# Altium PCB 2019_TFT_Strateasy.PCBDOC
Units mm, origin at the board's own origin, x right, y up, seen from the top; angles counter-clockwise.
Board outline 92.79 x 44.15 mm, 4 copper layers (1-TOP, 2-SIGNAL, 3-GND, 4-BOT), stack 1.727 mm thick; 51 components, 36 nets, 248 pads, 86 vias.
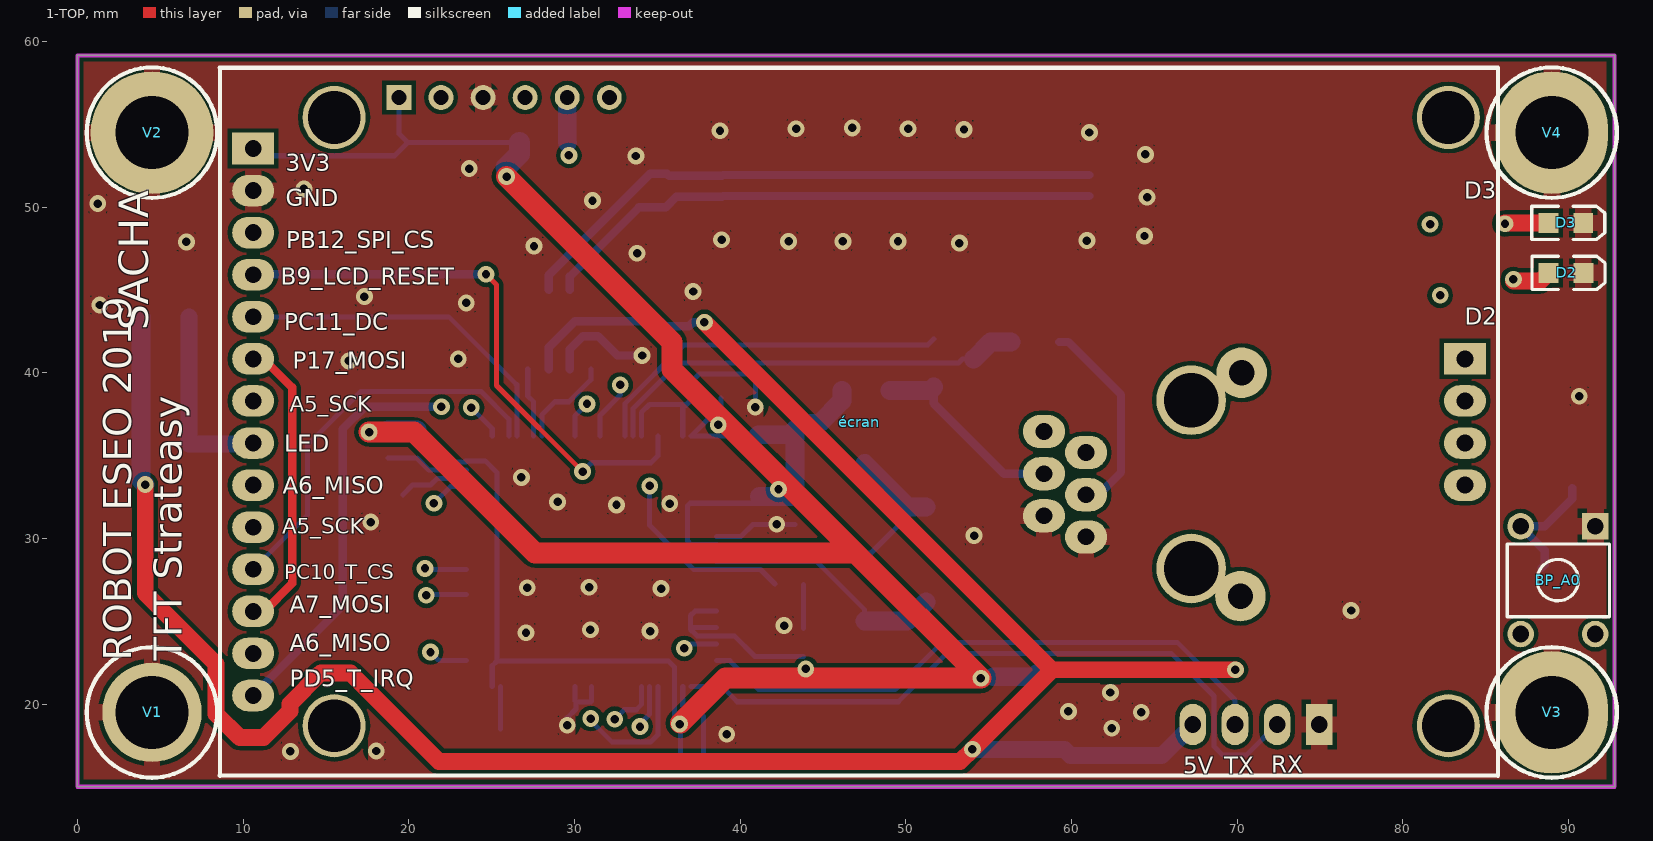
[diagram p0: 1-TOP view]
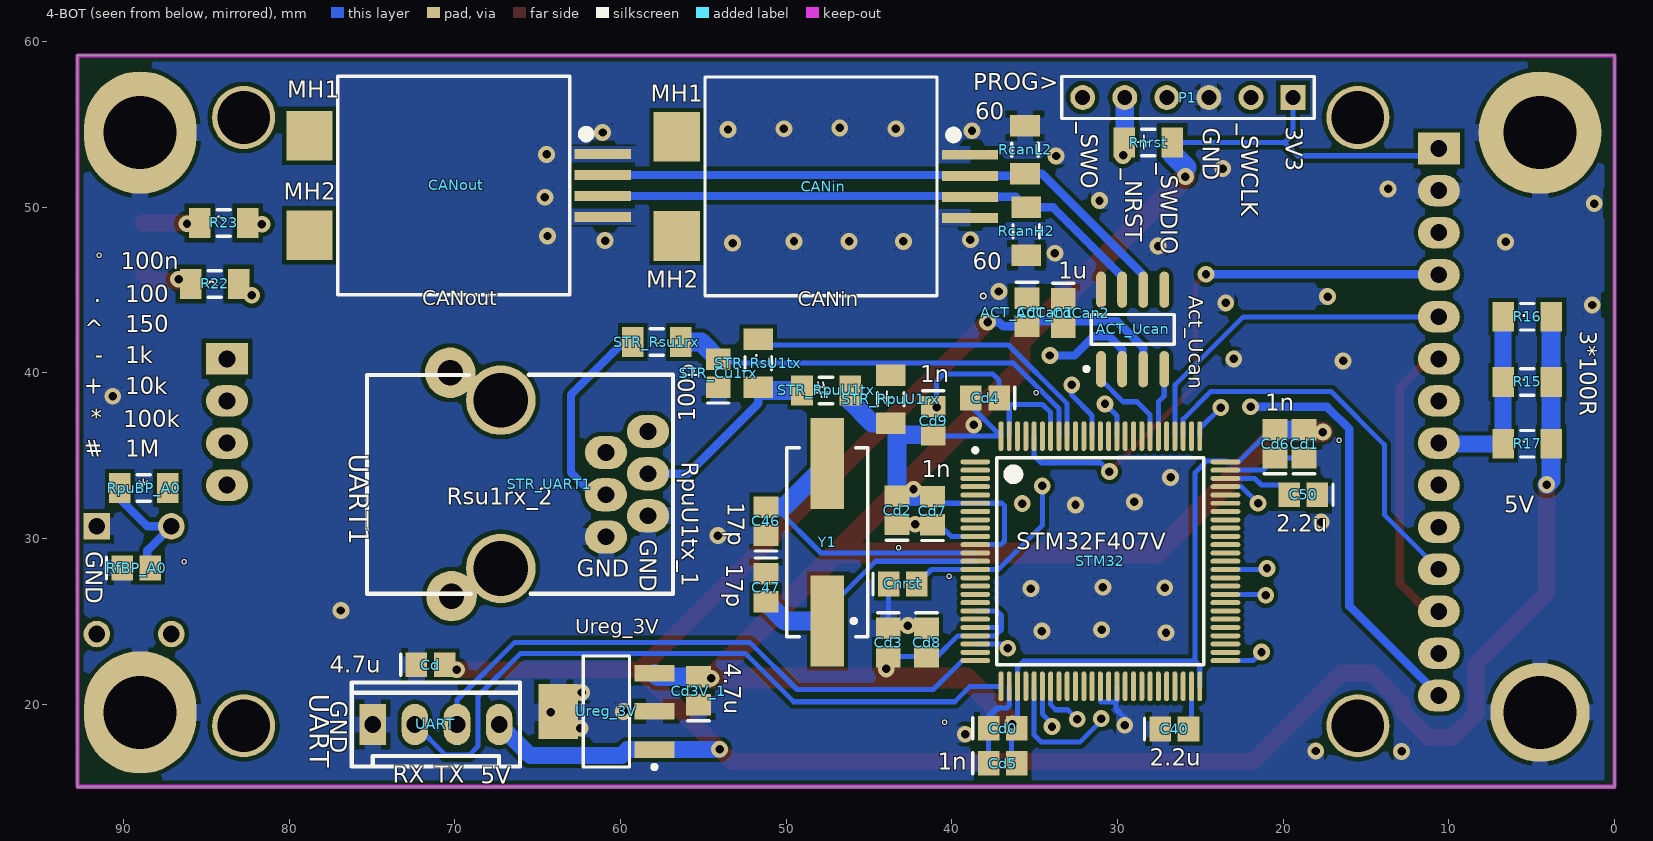
[diagram p1: 4-BOT view, seen from below]
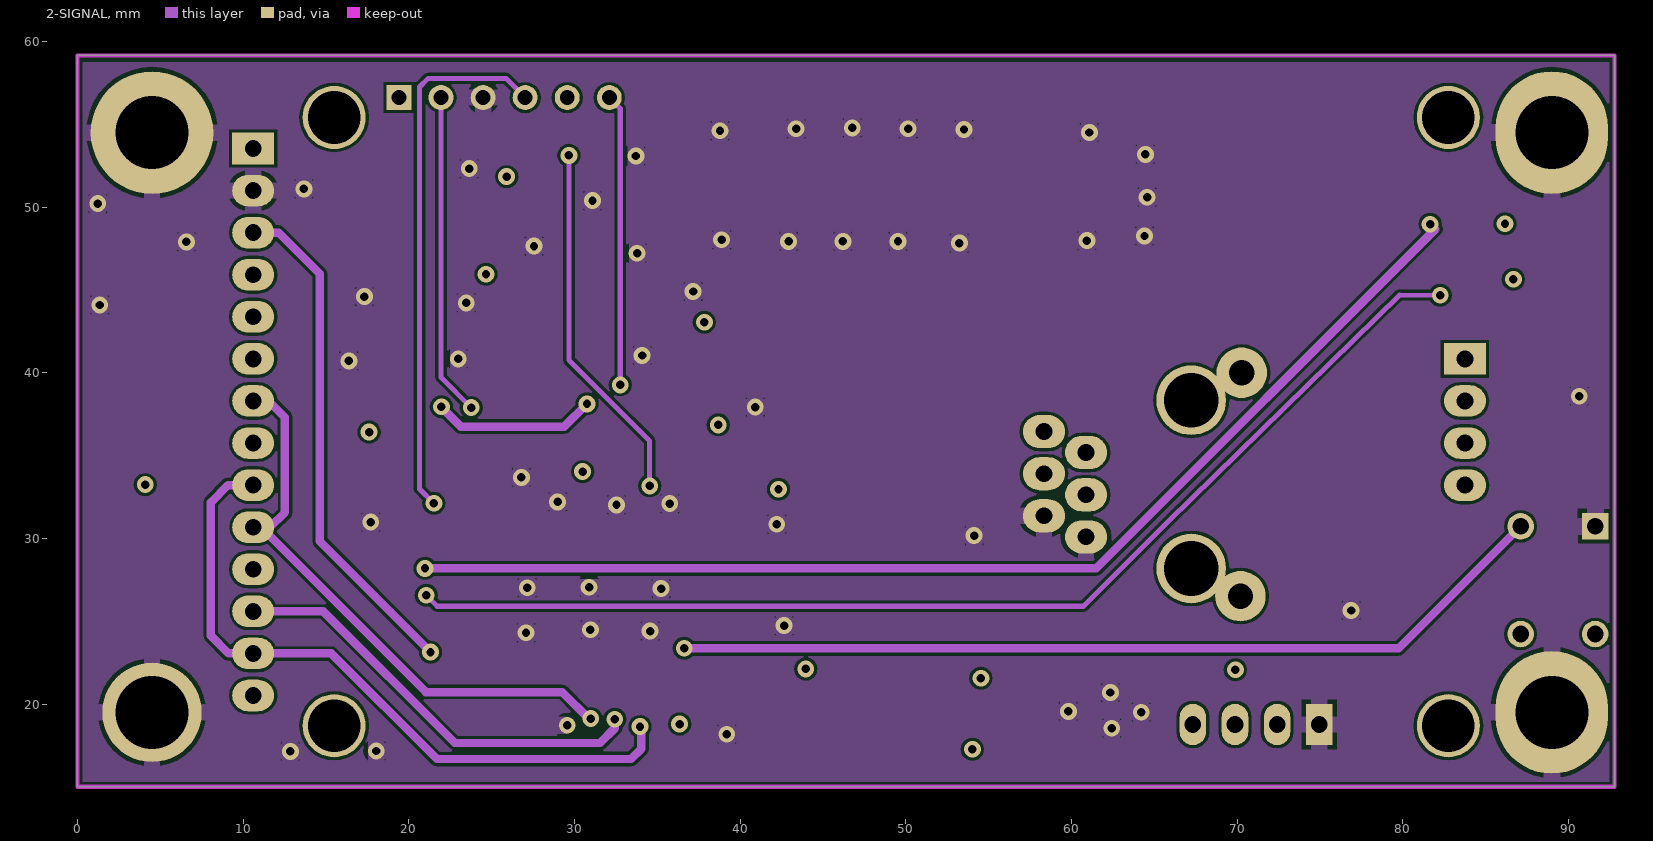
[diagram p2: 2-SIGNAL]
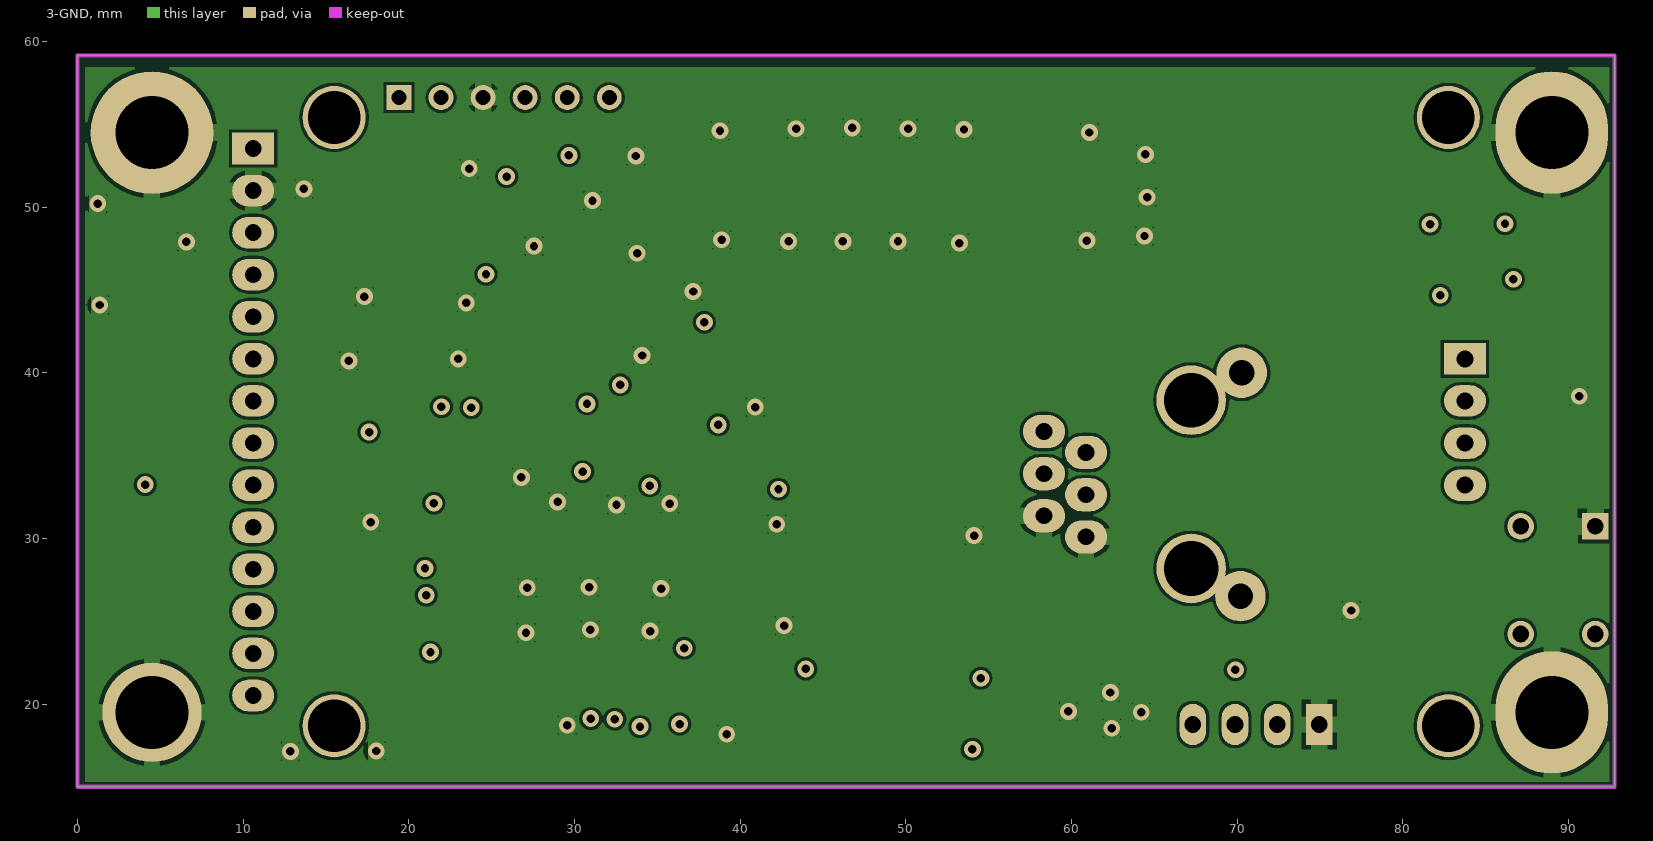
[diagram p3: 3-GND]
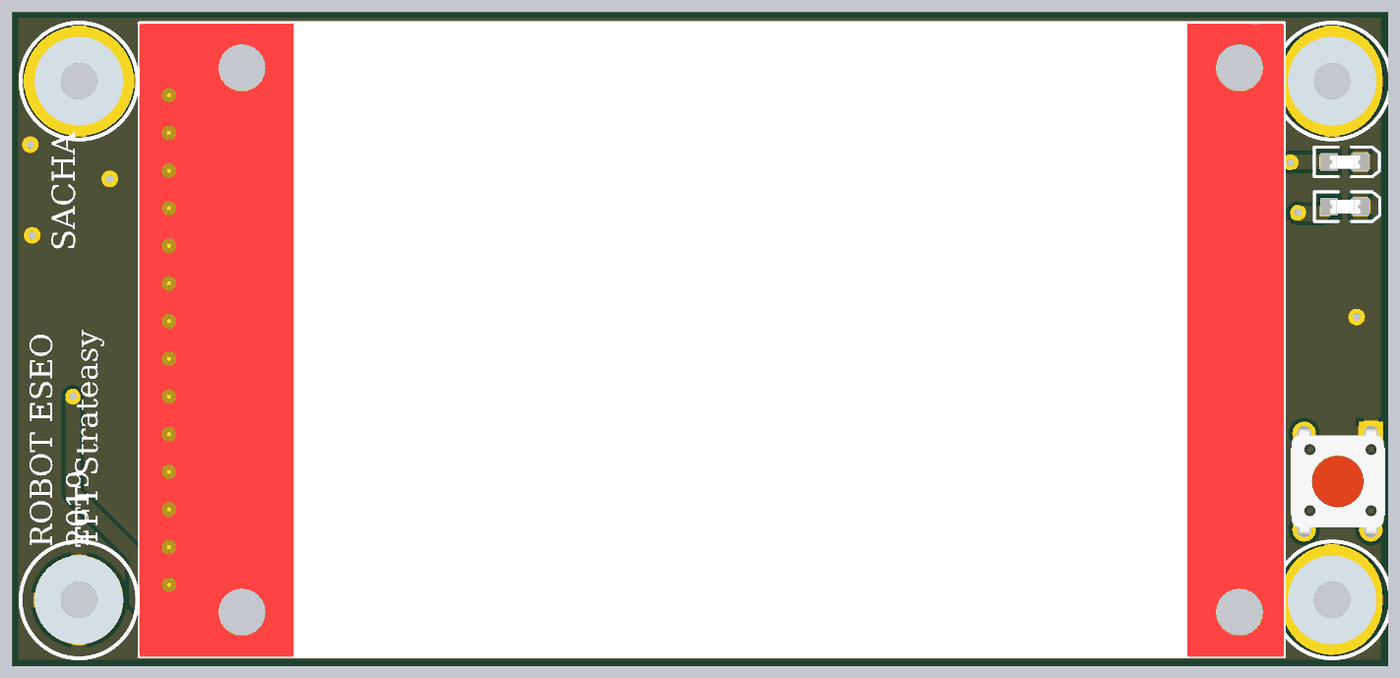
[diagram p4: 3D render of the assembled board from above, using the file's embedded part models]
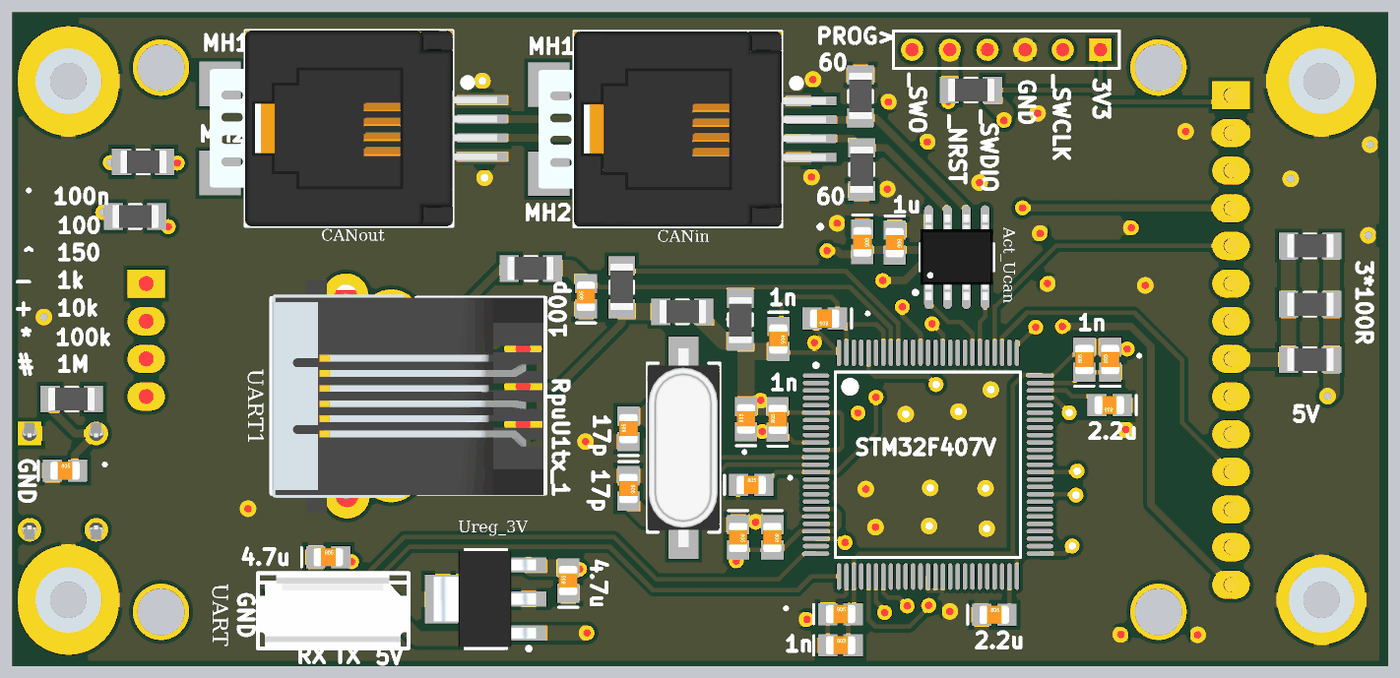
[diagram p5: 3D render of the assembled board from below, using the file's embedded part models]

## Layer stack, top to bottom
Top Solder: solder mask 0.0114, Solder Resist, Dk 3.5
1-TOP: signal copper 0.0356
Dielectric1: core 0.5283, FR-4, Dk 4.8
2-SIGNAL: signal copper 0.0356
Dielectric2: prepreg 0.5283, FR-4, Dk 4.8
3-GND: signal copper 0.0356
Dielectric3: core 0.5283, FR-4, Dk 4.8
4-BOT: signal copper 0.0356
Bottom Solder: solder mask 0.0114, Solder Resist, Dk 3.5

## Board outline
0,15.011 0,59.157 92.786,59.157 92.786,15.011

## Design rules (kind name [scope] priority, off if disabled: settings)
Clearance PowerPlaneClearance [InNamedPolygon('Bot-GND') Or  InNamedPolygon('Top-GND')] p1: gap=0.254
Clearance [All] p2: gap=0.178
FabricationTestPointUsage TestPointUsage [All] p1: valid=0 allowmultiple=FALSE
FabricationTestpoint Testpoint [All] p1: side=3 testpointundercomponent=TRUE minsize=1.016 maxsize=2.54 preferedsize=1.524 minholesize=0.508 maxholesize=1.016 preferedholesize=0.813 testpointgrid=0.025 allowsidetop=TRUE allowsidebottom=TRUE usegrid=TRUE gridtolerance=0
Height [All] p1: minheight=0 maxheight=50.8 prefheight=12.7
HoleSize [All] p1: absolutevalues=TRUE maxlimit=7.62 minlimit=0.025 maxpercent=80.000 minpercent=20.000
PlaneClearance [All] p1: clearance=1.016
PlaneConnect [All] p1: planeconnectstyle=Relief reliefexpansion=0.5 reliefentries=4 reliefconductorwidth=1.016 reliefairgap=0.5
PolygonConnect [All] p1: connectstyle=Relief reliefconductorwidth=1.016 reliefentries=4 polygonreliefangle="90 Angle" airgapwidth=0.254
RoomDefinition 2019_TFT_Strateasy [InComponentClass('2019_TFT_Strateasy')] p1: confinementstyle=ConfineIn formatcopy=TRUE lockcomponents=FALSE outline -101.6,-152.4 -50.8,-152.4 -50.8,-127 -101.6,-127
RoutingVias [All] p1: holewidth=0.6 width=1.524 viastyle="Through Hole" minholewidth=0.6 minwidth=1.524 maxholewidth=0.6 maxwidth=1.524
SilkToSolderMaskClearance SilkscreenOverComponentPads [IsPad] p1: minsilkscreentomaskgap=0.254 clearancetoexposedcopper=TRUE
SolderMaskExpansion [All] p1: expansion=0.051
Width [All] p1: maxlimit=25.4 minlimit=0.279 preferedwidth=1.016
22 further rules are at their usual default settings.

## Components (designator, comment, footprint, x,y, rotation, side; value= is the part's Value field where it differs from the comment)
ACT_CdCan1 "100nF" C0805_N 35.461,43.663 r270 bottom
ACT_CdCan2 "1µF" C0805_N 33.276,43.612 r270 bottom
ACT_Ucan "MCP2551-I/SN" SO8_N 29.085,42.621 r90 bottom
BP_A0 "SW_Pushbutton_6x6mm_Vertical" "Switch 6x6 Vertical" 91.618,30.732 r270 top
C40 "2.2uF" C0805_N 26.568,18.491 r180 bottom
C46 "17pF" C0805_N 51.232,31.039 r90 bottom
C47 "17pF" C0805_N 51.232,27.026 r270 bottom
C50 "2.2uF" C0805_N 18.796,32.639 r0 bottom
CANin "634104149621" 634104149621 47.904,51.257 r270 bottom
CANout "634104149621" 634104149621 70.079,51.308 r270 bottom
Cd "4.7u" C0805_N 71.476,22.377 r180 bottom
Cd0 "100nF" C0805_N 36.936,18.542 r180 bottom
Cd1 "100nF" C0805_N 18.745,35.712 r90 bottom
Cd2 "100nF" C0805_N 43.307,31.699 r90 bottom
Cd3 "100nF" C0805_N 43.84,23.724 r270 bottom
Cd3V_1 "4.7u" C0805_N 55.296,20.803 r90 bottom
Cd4 "100nF" C0805_N 37.998,38.481 r0 bottom
Cd5 "1nF" C0805_N 36.936,16.434 r180 bottom
Cd6 "1nF" C0805_N 20.49,35.711 r90 bottom
Cd7 "1nF" C0805_N 41.173,31.674 r90 bottom
Cd8 "1nF" C0805_N 41.529,23.724 r270 bottom
Cd9 "1nF" C0805_N 41.123,37.109 r270 bottom
Cnrst "100nF" C0805_N 42.959,27.254 r180 bottom
D2 "LED" LED_0805 89.857,46.033 r0 top
D3 "LED" LED_0805 89.849,49.047 r0 top
P1 "ProgSWD" HDR1X6 19.406,56.617 r0 bottom
R15 "100" R1206_N 5.275,39.446 r180 bottom
R16 "100" R1206_N 5.275,43.383 r180 bottom
R17 "100" R1206_N 5.275,35.712 r180 bottom
R22 "150" R1206_N 84.498,45.364 r180 bottom
R23 "150" R1206_N 83.964,49.047 r180 bottom
RcanH2 "60" R1206_N 35.509,48.539 r270 bottom
RcanL2 "60" R1206_N 35.585,53.467 r90 bottom
RfBP_A0 "100nF" C0805_N 89.23,28.219 r180 bottom
Rnrst "100k" R1206_N 28.143,53.899 r180 bottom
RpuBP_A0 "100k" R1206_N 88.773,33.045 r0 bottom
STM32 "STM32F407VGT6" STM-LQFP100_N 31.039,28.626 r180 bottom
STR_Cu1rx "100pF" C0805_N 54.102,39.98 r90 bottom
STR_RpuU1rx "10k" R1206_N 43.688,38.405 r270 bottom
STR_RpuU1tx "1M" R1206_N 47.6,38.938 r180 bottom
STR_Rsu1rx "1k" R1206_N 57.81,41.859 r0 bottom
STR_RsU1tx "100" R1206_N 51.689,40.589 r90 bottom
STR_UART1 "RJ11_6/6" "RJ11_6/6 - Wurth Half Shielded Tab Down WR-MJ" 58.344,31.369 r0 bottom
UART "BARRETTE4" HE14_4 74.955,18.771 r180 bottom
Ureg_3V "MCP1826S-3302E/DB" SOT223-4N 60.858,19.558 r0 bottom
V1 "Entretoise WURTH CMS" ENTRETOISE_CMS#1 4.5,19.5 r0 top
V2 "Entretoise WURTH CMS" ENTRETOISE_CMS#2 4.5,54.5 r0 top
V3 "Entretoise WURTH CMS" ENTRETOISE_CMS#3 89,19.5 r0 top
V4 "Entretoise WURTH CMS" ENTRETOISE_CMS#3 89,54.5 r0 top
Y1 "8MHz" HC49/4H_SMX 47.523,29.769 r90 bottom
écran "2.4_TFT_TOUCH" 2.4_TFT_TOUCH 8.574,15.694 r0 top locked

## Footprints (in the part's own frame and the unit in brackets; to place one, negate y for a bottom-side part, rotate by r counter-clockwise, add the part's x,y. Pads: shape width x height; smd on the part's side, far side on the other; paste and mask are expansions set on the pad)
2.4_TFT_TOUCH [mil]
  round 150 hole 125: 0(272.44,118.11) 0(272.44,1563.78) 0(2920.47,118.11) 0(2920.47,1563.78)
  rect 100x75 hole 40: 1(80,1490) 18(2959.84,990)
  oval 100x75 hole 40: 2(80,1390) 3(80,1290) 4(80,1190) 5(80,1090) 6(80,990) 7(80,890) 8(80,790) 9(80,690) 10(80,590) 11(80,490) 12(80,390) 13(80,290) 14(80,190) 15(2959.84,690) 16(2959.84,790) 17(2959.84,890)
  silkscreen extent 0,-1 3039,1682, body extent 0,-1 3039,1681, height 337
634104149621 [mm] "Modular Jack SMT Vertical Plastic 4P4C Top Entry"
  rect 0.6x3.4 smd: 1(-1.905,9) 2(-0.635,9) 3(0.635,9) 4(1.905,9)
  rect 3x2.8 smd: MH1(-3,-8.7) MH2(3,-8.7)
  silkscreen extent -6.6,-7 6.6,8.25, body extent -6.6,-9.4 6.6,10, height 13
C0805_N [mm] "Chip Capacitor, Body 2.0x1.3mm, IPC Medium Density"
  rect 1.3x1.5 smd: 1(-0.85,0) 2(0.85,0)
  silkscreen extent -1.8,-0.65 -1.8,0.65, body extent -0.99,-0.63 1.01,0.62, height 0.8
ENTRETOISE_CMS#1 [mm] "Entretoise CMS Wurth trou 4.4mm"
  round 6 hole 4.4: 1(0,0)
  silkscreen extent -3.94,-3.94 3.94,3.94, body extent -2.99,-3 2.99,2.98, height 3
ENTRETOISE_CMS#2 [mm] "Entretoise CMS Wurth trou 4.4mm"
  round 7.4 hole 4.4: 1(0,0)
  silkscreen extent -3.94,-3.94 3.94,3.94, body extent -2.99,-3 2.99,2.98, height 3
ENTRETOISE_CMS#3 [mm] "Entretoise CMS Wurth trou 4.4mm"
  oval 6.8x7.4 hole 4.4: 1(0,0)
  silkscreen extent -3.94,-3.94 3.94,3.94, body extent -2.99,-3 2.99,2.98, height 3
HC49/4H_SMX [mm] "Quartz Crystal, SM; Body 13.4 (inc. leads) x 4.9 mm (LxW max)"
  rect 5.5x2 smd: 1(-4.75,0) 2(4.75,0)
  silkscreen extent -5.7,-2.45 5.7,2.45, body extent -6.7,-2.45 6.7,2.45, height 5.08
HDR1X6 [mm]
  rect 1.5x1.5 hole 0.9: 1(0,0)
  round 1.5 hole 0.9: 2(2.54,0) 3(5.08,0) 4(7.62,0) 5(10.16,0) 6(12.7,0)
  silkscreen extent -1.27,-1.27 13.97,1.27
HE14_4 [mm] "Connector; HE14; 4 Position; Pin Spacing=2.54mm"
  rect 1.6x2.5 hole 1: 1(0,0)
  oval 1.6x2.5 hole 1: 2(2.54,0) 3(5.08,0) 4(7.62,0)
  silkscreen extent -1.27,-2.54 8.89,2.54, body extent -1.3,-2.45 8.86,2.55, height 11.42
LED_0805 [mm] "SM LED; 2 Flat Leads"
  rect 1.2x1.2 smd: 1(-1.05,0) 2(1.05,0)
  silkscreen extent -2.05,-1 2.35,1, body extent -1.05,-0.64 1.06,0.64, height 1.2
R1206_N [mm] "Chip Resistor, Body 3.2x1.6mm, IPC Medium Density"
  rect 1.3x1.8 smd: 1(-1.45,0) 2(1.45,0)
  silkscreen extent -0.4,-0.8 0.4,0.8, body extent -1.68,-0.87 1.68,0.87, height 0.71
"RJ11_6/6 - Wurth Half Shielded Tab Down WR-MJ" [mil] "Connector; RJ11; 6P/6C; 615 006 143 421"
  oval 100x78.74 hole 40: 1(0,-200) 2(100,-150.39) 3(0,-100) 4(100,-50) 5(0,0) 6(100,50)
  round 165.35 hole 130: FIX1(350,125.2) FIX2(350,-274.8)
  round 120 hole 60: FIX2(467,191) FIX2(470,-340)
  silkscreen extent -59,-335 668,185, body extent -54,-384 666,236, height 510
SO8_N [mm] "8-Pin Small Outline Integrated Circuit 1.27 mm Pitch, IPC Medium Density"
  oval 2.2x0.6 smd: 1(-2.4,1.905) 2(-2.4,0.635) 3(-2.4,-0.635) 4(-2.4,-1.905) 5(2.4,-1.905) 6(2.4,-0.635) 7(2.4,0.635) 8(2.4,1.905)
  silkscreen extent -2.51,-2.5 0.9,2.92, body extent -2.89,-2.45 2.89,2.46, height 1.75
SOT223-4N [mm] "SOT223/SC73, 4-Leads, Body 6.5x3.5mm, Pitch 2.3mm, Lead Span 7mm, IPC Medium Density"
  rect 2.4x1 smd: 1(-2.9,2.3) 2(-2.9,0) 3(-2.9,-2.3)
  rect 2.4x3.3 smd: 4(2.9,0)
  silkscreen extent -3.02,-3.35 1.4,3.47, body extent -3.39,-3.35 3.5,3.35, height 1.8
STM-LQFP100_N [mm] "Thin QFP, 100-Leads, Body 14x14mm, Pitch 0.5mm, IPC Medium Density"
  oval 1.8x0.3 smd: 1(-7.55,6) 2(-7.55,5.5) 3(-7.55,5) 4(-7.55,4.5) 5(-7.55,4) 6(-7.55,3.5) 7(-7.55,3) 8(-7.55,2.5) 9(-7.55,2) 10(-7.55,1.5) 11(-7.55,1) 12(-7.55,0.5) 13(-7.55,0) 14(-7.55,-0.5) 15(-7.55,-1) 16(-7.55,-1.5) 17(-7.55,-2) 18(-7.55,-2.5) 19(-7.55,-3) 20(-7.55,-3.5) 21(-7.55,-4) 22(-7.55,-4.5) 23(-7.55,-5) 24(-7.55,-5.5) 25(-7.55,-6) 51(7.55,-6) 52(7.55,-5.5) 53(7.55,-5) 54(7.55,-4.5) 55(7.55,-4) 56(7.55,-3.5) 57(7.55,-3) 58(7.55,-2.5) 59(7.55,-2) 60(7.55,-1.5) 61(7.55,-1) 62(7.55,-0.5) 63(7.55,0) 64(7.55,0.5) 65(7.55,1) 66(7.55,1.5) 67(7.55,2) 68(7.55,2.5) 69(7.55,3) 70(7.55,3.5) 71(7.55,4) 72(7.55,4.5) 73(7.55,5) 74(7.55,5.5) 75(7.55,6)
  oval 0.3x1.8 smd: 26(-6,-7.55) 27(-5.5,-7.55) 28(-5,-7.55) 29(-4.5,-7.55) 30(-4,-7.55) 31(-3.5,-7.55) 32(-3,-7.55) 33(-2.5,-7.55) 34(-2,-7.55) 35(-1.5,-7.55) 36(-1,-7.55) 37(-0.5,-7.55) 38(0,-7.55) 39(0.5,-7.55) 40(1,-7.55) 41(1.5,-7.55) 42(2,-7.55) 43(2.5,-7.55) 44(3,-7.55) 45(3.5,-7.55) 46(4,-7.55) 47(4.5,-7.55) 48(5,-7.55) 49(5.5,-7.55) 50(6,-7.55) 76(6,7.55) 77(5.5,7.55) 78(5,7.55) 79(4.5,7.55) 80(4,7.55) 81(3.5,7.55) 82(3,7.55) 83(2.5,7.55) 84(2,7.55) 85(1.5,7.55) 86(1,7.55) 87(0.5,7.55) 88(0,7.55) 89(-0.5,7.55) 90(-1,7.55) 91(-1.5,7.55) 92(-2,7.55) 93(-2.5,7.55) 94(-3,7.55) 95(-3.5,7.55) 96(-4,7.55) 97(-4.5,7.55) 98(-5,7.55) 99(-5.5,7.55) 100(-6,7.55)
  silkscreen extent -7.68,-6.25 6.25,6.82, body extent -7,-7 7,7, height 1.6
"Switch 6x6 Vertical" [mm]
  rect 1.6x1.6 hole 1: 1(0,0)
  round 1.6 hole 1: 2(6.5,0) 3(0,-4.5) 4(6.5,-4.5)
  silkscreen extent 1.07,-5.31 5.46,0.86, body extent -0.71,-5.34 7.19,0.86, height 7

## Part data
ACT_CdCan1 ACT_CdCan2 C40 C46 C47 C50 Cd Cd0 Cd1 Cd2 Cd3 Cd4 Cd5 Cd6 Cd7 Cd8 Cd9 Cnrst RfBP_A0 STR_Cu1rx: library part Condensateur, "Capacitor"
ACT_Ucan: "High-Speed CAN Transceiver, 8-Pin SOIC, Industrial Temperature"
BP_A0: "Switch tactil 6mm x 6mm Vertical"
CANin CANout: "Modular Jack SMT Vertical Plastic 4P4C Top Entry WR-MJ"
Cd3V_1: library part Capacitor, "Capacitor"
D2 D3: "Typical LED"
P1: library part "Header 6", "Header, 6-Pin"
R15 R16 R17 R22 R23 RcanH2 RcanL2 Rnrst RpuBP_A0 STR_RpuU1rx STR_RpuU1tx STR_Rsu1rx STR_RsU1tx: library part Resistor, "Resistor"
STM32: "ARM Cortex-M4 32-bit MCU+FPU, 210 DMIPS, 1024 kB Flash, 192 kB Internal RAM, 82 I/Os, 100-pin LQFP, -40 to 85 degC, Tray"
STR_UART1: "Right Angle, Standard Profile, Offset Latch DECconnect, Flangeless PCB Jack"
UART: "Header, 4-Pin"
Ureg_3V: "1000 mA, Low Voltage, Low Quiescent Current LDO Regulator, 3-Pin SOT-223, Extended Temperature"
V1 V2 V3 V4: "Entretoise Wurth"
Y1: library part Quartz, "Crystal Oscillator"

## Via types
v1: diameter 1.016, hole 0.508, 1-TOP to 4-BOT, 86 vias

## Nets (pads, with @x,y where several pads share a name; then routed paths per layer and width w, separated by ;. In a path a pad name is that pad's centre, name@x,y a point inside that pad or via, vN(x,y) a via of type N, cw(c..) or ccw(c..) an arc to the next point about the centre after c; other vN are vias at no path point)
3V3: Cd0.2 Cd1.2 Cd2.2 Cd3.2 Cd3V_1.2 Cd4.2 Cd5.2 Cd6.2 Cd7.2 Cd8.2 Cd9.2 P1.1 Rnrst.2 STM32.6 STM32.11 STM32.19 STM32.21 STM32.22 STM32.28 STM32.50 STM32.75 STM32.100 STR_RpuU1rx.2 STR_RpuU1tx.2 Ureg_3V.3 écran.1 | length 194.9
  1-TOP w1.27: v1(17.602,36.424) 20.32,36.424 27.618,29.126 46.973,29.126 v1(54.534,21.565) 39.13,21.565 v1@36.412,18.847 ; v1(25.908,51.841) 35.89,41.859 35.89,40.208 47.123,28.975
  4-BOT w0.305: écran.1 11.043,53.103 19.143,53.103 19.939,53.899 ; P1.1 19.406,54.432 19.939,53.899 ; Cd6.2 20.742,36.561 22.677,34.626 STM32.75 ; STM32.75@23.43,34.685 24.608,34.685 25.324,33.968 25.324,22.606 ; STM32.50 25.039,22.321 25.324,22.606 ; Rnrst.2 19.939,53.899 ; Cd5.2@36.412,16.739 36.412,18.847 36.039,19.22 STM32.28 36.039,22.229 35.662,22.606 25.324,22.606 ; 37.173,24.626 STM32.21 ; 37.334,24.185 37.012,24.507 37.012,25.349 37.289,25.626 STM32.19 ; 37.393,24.126 STM32.22 39.649,24.126 40.902,22.874 Cd8.2 Cd3.2 ; STM32.11 37.049,29.626 36.83,29.845 36.83,31.979 36.977,32.126 STM32.6 Cd7.2@41.173,32.126 ; Cd4.2 38.848,37.985 STM32.100 Cd9.2@41.123,36.176 ; STR_RpuU1rx.2@43.307,36.574 STR_RpuU1rx.2
  4-BOT w1.143: Cd1.2 20.488,36.562 Cd6.2 ; Cd9.2 42.993,36.259 43.307,36.574 Cd2.2 43.282,32.524 Cd7.2 ; STR_RpuU1rx.2 44.803,36.955 46.15,38.301 STR_RpuU1tx.2 ; Cd3V_1.2 57.753,21.653 Ureg_3V.3
  4-BOT w1.27: 25.883,52.4 26.693,53.211 Rnrst.2
  other v1: 36.347,18.796 43.967,22.123 42.316,32.969 38.684,36.855
5V: ACT_CdCan1.2 ACT_CdCan2.2 ACT_Ucan.3 Cd.2 R15.2 R16.2 R17.2 UART.4 Ureg_3V.1 | length 149.4
  1-TOP w1.016: v1(4.089,33.249) 4.089,26.695 8.37,22.415 8.37,19.41 9.796,17.983 11.227,17.983 12.827,19.583 12.827,20.015 14.681,21.869 16.485,21.869 21.819,16.535 53.287,16.535 v1(54.023,17.272) 58.824,22.073 ; v1(37.843,43.053) 58.824,22.073 ; v1(69.901,22.073) 58.824,22.073
  4-BOT w0.508: ACT_Ucan.3 28.45,41.531 30.031,43.112 35.162,43.112 ACT_CdCan1.2 36.908,42.813 37.148,43.053 v1@37.389,43.053
  4-BOT w1.016: v1(54.023,17.272) 54.037,17.258 Ureg_3V.1 59.577,17.258 59.944,16.891 65.456,16.891 UART.4
  4-BOT w1.143: R16.2 R15.2 R17.2 3.825,33.513 v1(4.089,33.249)
+3V3: RpuBP_A0.1
CANH: ACT_Ucan.7 CANin.3 CANout.3 RcanH2.1 | length 34.2
  4-BOT w0.508: ACT_Ucan.7 29.72,45.824 33.886,49.989 RcanH2.1 36.142,50.622 CANin.3 38.955,50.673 CANout.3
CANL: ACT_Ucan.6 CANin.2 CANout.2 RcanL2.1 | length 36.1
  4-BOT w0.508: ACT_Ucan.6 28.45,45.9 34.567,52.017 RcanL2.1 35.71,51.892 CANin.2 38.955,51.943 CANout.2
GND: ACT_CdCan1.1 ACT_CdCan2.1 ACT_Ucan.2 ACT_Ucan.8 BP_A0.1 C40.1 C46.1 C47.1 C50.1 CANin.1 CANin.4 CANout.1 CANout.4 Cd0.1 Cd1.1 Cd2.1 Cd3.1 Cd3V_1.1 Cd4.1 Cd5.1 Cd6.1 Cd7.1 Cd8.1 Cd9.1 Cd.1 Cnrst.1 D2.2 D3.2 P1.3 RcanH2.2 RcanL2.2 RfBP_A0.1 STM32.10 STM32.20 STM32.27 STM32.38 STM32.39 STM32.40 STM32.74 STM32.94 STM32.99 STR_Cu1rx.1 STR_UART1.5 STR_UART1.6 UART.1 Ureg_3V.2 Ureg_3V.4 V1.1 V2.1 V3.1 V4.1 écran.2 | length 42.6
  4-BOT w0.305: Cd1.1 Cd6.1@20.488,34.862 ; Cd6.1 21.225,34.126 STM32.74 ; v1(29.566,18.72) 29.566,19.177 30.099,19.71 30.099,20.117 30.988,20.117 31.039,20.168 STM32.38 ; STM32.40@30.039,20.177 STM32.40 ; STM32.94 34.039,37.603 34.529,38.093 Cd4.1@36.761,38.093 ; STM32.27 36.539,19.9 36.678,19.761 37.284,19.761 37.786,19.259 Cd0.1 Cd5.1 ; STM32.99 36.539,37.871 Cd4.1@36.761,38.093 ; STM32.10 40.057,30.126 40.781,30.849 Cd2.1 ; v1(40.919,37.933) 40.919,39.511 40.501,39.929 37.541,39.929 37.148,39.536 Cd4.1 Cd4.1@36.761,38.093 ; Cd3.1 Cnrst.1@43.84,27.223
  4-BOT w0.508: ACT_Ucan.2 29.72,41.43 30.505,42.215 31.42,42.215 32.588,41.046 v1(34.087,41.046)
  other v1: 12.852,17.145 18.034,17.17 39.192,18.186 62.433,18.542 64.211,19.507 59.817,19.558 62.357,20.701 27.076,24.308 34.569,24.409 30.963,24.486 42.657,24.74 76.886,25.654 35.23,26.975 27.153,27.026 30.886,27.051 54.127,30.175 42.208,30.861 17.704,30.988 32.537,32.029 35.755,32.106 28.981,32.207 26.797,33.684 90.653,38.583 16.383,40.716 22.987,40.843 1.346,44.094 23.47,44.221 17.323,44.602 37.16,44.907 33.782,47.219 27.559,47.65 53.238,47.828 6.579,47.904 42.926,47.93 46.203,47.93 49.53,47.93 60.935,47.981 38.887,48.029 64.414,48.26 1.219,50.216 31.09,50.394 64.567,50.597 13.665,51.105 23.647,52.324 33.709,53.086 64.465,53.188 61.087,54.508 38.786,54.61 53.518,54.688 43.383,54.737 50.14,54.737 46.769,54.788
LED: R15.1 R16.1 R17.1 écran.8 | length 11.6
  4-BOT w1.016: R16.1 R15.1 R17.1 10.558,35.712 écran.8
NetC40_2: C40.2 STM32.49 | length 2.6
  4-BOT w0.305: C40.2@25.539,18.491 STM32.49
NetC46_2: C46.2 STM32.12 Y1.2 | length 18.6
  4-BOT w0.305: STM32.12 47.899,29.126 50.662,31.889 C46.2
  4-BOT w1.143: Y1.2 50.153,31.889 C46.2
NetC47_2: C47.2 STM32.13 Y1.1 | length 15
  4-BOT w0.305: STM32.13 44.602,28.626 47.523,25.705 Y1.1
  4-BOT w1.143: Y1.1 50.075,25.019 C47.2
NetC50_2: C50.2 STM32.73 | length 4.3
  4-BOT w0.305: C50.2 20.23,33.223 21.311,33.223 21.713,33.626 STM32.73
NetD2_1: D2.1 R22.1 | length 2.3
  1-TOP w1.016: v1@86.682,45.55 88.325,45.55 D2.1
  other v1: 86.682,45.644
NetD3_1: D3.1 R23.1 | length 2.6
  1-TOP w1.016: v1@86.174,49.047 D3.1
  other v1: 86.174,48.997
NetSTR_RpuU1tx_1: STR_RpuU1tx.1 STR_RsU1tx.1 STR_UART1.3 | length 12.1
  4-BOT w0.508: STR_RsU1tx.1 51.689,38.151 55.931,33.909 STR_UART1.3
  4-BOT w1.143: STR_RpuU1tx.1 51.488,38.938 STR_RsU1tx.1
NetSTR_Rsu1rx_2: STR_Rsu1rx.2 STR_UART1.4 | length 12.4
  4-BOT w0.508: STR_Rsu1rx.2 59.817,41.859 62.992,38.684 62.992,33.985 61.646,32.639 STR_UART1.4
PA0_Button: BP_A0.3 RfBP_A0.2 RpuBP_A0.2 STM32.23 | length 62.8
  2-SIGNAL w0.508: v1(36.627,23.368) 79.754,23.368 BP_A0.3
  4-BOT w0.305: v1@36.932,23.626 STM32.23
  4-BOT w0.508: RfBP_A0.2 88.567,28.407 88.567,29.282 BP_A0.3 88.567,30.732 90.223,32.387 RpuBP_A0.2
PA2_TX: STM32.25 UART.3 | length 36.1
  4-BOT w0.305: STM32.25 39.376,22.626 41.123,20.879 49.352,20.879 52.206,23.733 66.386,23.733 69.875,20.244 UART.3
PA3_RX: STM32.26 UART.2 | length 42.1
  4-BOT w0.305: STM32.26 38.894,21.076 39.827,20.142 49.555,20.142 52.476,23.063 66.031,23.063 68.605,20.488 68.605,17.45 69.139,16.916 70.561,16.916 UART.2
PA5_SPI_SCK: STM32.30 écran.7 écran.10 | length 42.8
  2-SIGNAL w0.508: écran.10 écran.10@11.077,30.68 ; écran.7 11.534,38.3 12.522,37.313 12.522,31.572 11.63,30.68 écran.10@11.077,30.68 ; v1@30.924,19.063 29.261,20.726 21.031,20.726 écran.10@11.077,30.68
  4-BOT w0.305: v1@30.924,19.063 32.283,17.704 34.595,17.704 35.039,18.148 STM32.30
  other v1: 30.988,19.126
PA6_SPI_MISO: STM32.31 écran.9 écran.13 | length 44.9
  2-SIGNAL w0.508: écran.9 9.09,33.22 8.052,32.182 8.052,24.13 9.121,23.06 écran.13 15.319,23.06 21.692,16.688 33.426,16.688 34.036,17.297 34.036,18.898 33.96,18.821 v1(33.96,18.644)
  4-BOT w0.305: v1(33.96,18.644) 33.96,18.821 34.539,19.4 STM32.31
PA7_SPI_MOSI: STM32.32 écran.6 écran.12 | length 47.1
  1-TOP w0.508: écran.6@11.235,40.84 12.954,39.122 12.954,27.28 écran.12@11.275,25.6
  2-SIGNAL w0.508: écran.12 14.836,25.6 22.784,17.653 31.547,17.653 32.436,18.542 v1(32.436,19.09)
  4-BOT w0.305: v1(32.436,19.09) 33.005,19.66 33.731,19.66 34.039,19.967 STM32.32
  4-BOT w0.508: écran.12 écran.12@11.275,25.6 ; écran.6 écran.6@11.235,40.84
PB6_U1TX: STM32.92 STR_RsU1tx.2 | length 22.2
  4-BOT w0.305: STM32.92 33.039,38.137 36.583,41.681 51.331,41.681 STR_RsU1tx.2
PB7_U1RX: STM32.93 STR_Cu1rx.2 STR_RpuU1rx.1 STR_Rsu1rx.1 | length 26.1
  4-BOT w0.305: STM32.93 33.539,37.831 36.297,40.589 53.188,40.589 53.428,40.83 STR_Cu1rx.2
  4-BOT w1.143: STR_Cu1rx.2 55.132,41.859 STR_Rsu1rx.1
PB9_LCD_Reset: STM32.96 écran.4 | length 34.5
  1-TOP w0.305: v1(24.663,45.949) 25.298,45.314 25.298,39.231 v1(30.493,34.036)
  4-BOT w0.305: v1(30.493,34.036) 31.027,34.569 34.62,34.569 35.039,34.988 STM32.96
  4-BOT w0.508: écran.4@10.634,45.949 v1(24.663,45.949)
PB12_SPI_CS: STM32.51 écran.3 | length 33
  2-SIGNAL w0.508: écran.3 12.144,48.46 14.63,45.974 14.63,29.82 v1(21.311,23.139)
  4-BOT w0.305: v1(21.311,23.139) 21.824,22.626 STM32.51
PC10_T_CS: STM32.78 écran.11 | length 24.1
  4-BOT w0.305: écran.11 13.894,31.428 13.894,35.662 17.103,38.871 24.371,38.871 26.039,37.203 STM32.78
PC11_DC: STM32.79 écran.5 | length 20.7
  4-BOT w0.305: écran.5 22.406,43.38 26.479,39.306 ; STM32.79 26.539,39.306
PD0_CANRX: ACT_Ucan.4 STM32.81 | length 4.2
  4-BOT w0.305: ACT_Ucan.4 27.18,38.606 27.539,38.247 STM32.81
PD1_CANTX: ACT_Ucan.1 STM32.82 | length 5.8
  4-BOT w0.305: STM32.82 28.039,37.462 28.829,38.252 29.667,38.252 30.99,39.576 ACT_Ucan.1
PD5_T_IRQ: STM32.86 écran.14 | length 36.7
  2-SIGNAL w0.508: v1@22.123,37.77 23.139,36.754 29.388,36.754 v1(30.759,38.125)
  4-BOT w0.305: STM32.86 30.039,37.405 v1(30.759,38.125)
  4-BOT w0.508: écran.14 16.002,25.916 16.002,36.601 17.348,37.948 v1(21.971,37.948)
PD12: R22.2 STM32.59 | length 71.6
  2-SIGNAL w0.305: v1(21.057,26.568) 21.717,25.908 60.731,25.908 65.862,31.039 79.816,44.704 v1(82.263,44.679)
  4-BOT w0.305: v1(21.057,26.568) 21.114,26.626 STM32.59
PD15: R23.2 STM32.62 | length 72
  2-SIGNAL w0.508: v1(20.98,28.194) 61.493,28.194 v1@81.966,48.666
  4-BOT w0.305: v1@21.049,28.126 STM32.62
  4-BOT w0.508: v1(20.98,28.194) v1@21.049,28.126
  other v1: 81.653,48.971
PROG_NRST: Cnrst.2 P1.5 Rnrst.1 STM32.14 | length 36.1
  2-SIGNAL w0.305: v1(29.668,53.122) 29.668,40.766 34.544,35.89 v1(34.544,33.172)
  4-BOT w0.305: v1(34.544,33.172) 34.544,30.785 37.203,28.126 STM32.14 41.238,28.126 Cnrst.2
  4-BOT w1.143: P1.5 29.566,53.926 Rnrst.1
PROG_SWCLK: P1.2 STM32.76 | length 21.7
  2-SIGNAL w0.305: P1.2 21.946,39.726 v1(23.774,37.897)
  4-BOT w0.305: v1(23.774,37.897) 25.039,36.632 STM32.76
PROG_SWDIO: P1.4 STM32.72 | length 34.9
  2-SIGNAL w0.305: v1(21.514,32.126) 20.65,32.989 20.65,57.252 21.172,57.773 25.869,57.773 P1.4
  4-BOT w0.305: v1(21.514,32.126) 22.514,33.126 STM32.72
PROG_SWO: P1.6 STM32.89 | length 21.2
  2-SIGNAL w0.305: P1.6 32.766,55.956 v1(32.766,39.268)
  4-BOT w0.305: STM32.89 31.539,37.427 32.766,38.655 v1(32.766,39.268)
pads on no net: ACT_Ucan.5 BP_A0.2 BP_A0.4 CANin.MH1 CANin.MH2 CANout.MH1 CANout.MH2 STM32.1 STM32.2 STM32.3 STM32.4 STM32.5 STM32.7 STM32.8 STM32.9 STM32.15 STM32.16 STM32.17 STM32.18 STM32.24 STM32.29 STM32.33 STM32.34 STM32.35 STM32.36 STM32.37 STM32.41 STM32.42 STM32.43 STM32.44 STM32.45 STM32.46 STM32.47 STM32.48 STM32.52 STM32.53 STM32.54 STM32.55 STM32.56 STM32.57 STM32.58 STM32.60 STM32.61 STM32.63 STM32.64 STM32.65 STM32.66 STM32.67 STM32.68 STM32.69 STM32.70 STM32.71 STM32.77 STM32.80 STM32.83 STM32.84 STM32.85 STM32.87 STM32.88 STM32.90 STM32.91 STM32.95 STM32.97 STM32.98 STR_UART1.1 STR_UART1.2 STR_UART1.FIX1 STR_UART1.FIX2 écran.0 écran.15 écran.16 écran.17 écran.18

## Polygon pours and split planes (outlines as drawn)
GND on 4-BOT "Bot-GND" (solid, pour order 8): 0.61,59.03 92.786,59.03 92.786,15.011 0.61,15.011
GND on 3-GND "3-GND" (solid, pour order 7): 0.457,58.445 92.786,58.445 92.786,15.011 0.457,15.011
GND on 2-SIGNAL "2-GND" (solid, pour order 6): 0.305,58.75 92.685,58.75 92.685,15.316 0.305,15.316
GND on 1-TOP "Top-GND" (solid, pour order 5): 0.305,58.928 92.298,58.928 92.298,15.469 0.305,15.469

## Keep-outs
KeepOutLayer:
  the board outline again, w0.254

## Silkscreen, mask and mechanical layers (free items; w line width, h text height)
Top Overlay:
  text "3V3" at 12.573,52.178 h1.02
  text "D3" at 83.718,50.521 h1.02
  text "GND" at 12.573,50.044 h1.02
  text "PB12_SPI_CS" at 12.598,47.53 h1.02
  text "B9_LCD_RESET" at 12.268,45.314 h1.02
  text "D2" at 83.754,42.901 h1.02
  text "SACHA" at 4.875,42.583 h3.05 r90
  text "PC11_DC" at 12.497,42.583 h1.02
  text "P17_MOSI" at 13.005,40.246 h1.02
  text "A5_SCK" at 12.827,37.649 h0.94
  text "LED" at 12.497,35.236 h1.02
  text "A6_MISO" at 12.395,32.69 h1.02
  text "A5_SCK" at 12.37,30.283 h0.94
  text "PC10_T_CS" at 12.471,27.54 h0.89
  text "A7_MOSI" at 12.802,25.502 h1.02
  text "A6_MISO" at 12.802,23.196 h1.02
  text "ROBOT ESEO 2019" at 3.824,22.606 h2.92 r90
  text "TFT Strateasy" at 6.883,22.606 h2.92 r90
  text "PD5_T_IRQ" at 12.827,21.037 h1.02
  text "RX" at 72.06,15.856 h1.02
  text "5V" at 66.751,15.805 h1.02
  text "TX" at 69.215,15.805 h1.02
Bottom Overlay:
  text "PROG>" at 38.71,57.048 h1.02
  text "MH1" at 80.129,56.591 h1.02
  text "MH1" at 58.191,56.363 h1.02
  text "60" at 38.583,55.27 h1.02
  text "_SWO" at 32.233,55.125 h1.02 r90
  text "_SWCLK" at 22.53,55.042 h1.02 r90
  text "3V3" at 19.837,54.864 h1.02 r90
  text "GND" at 24.867,54.788 h1.02 r90
  text "+" at 27.813,53.475 h1.02
  text "_SWDIO" at 27.407,52.654 h1.02 r90
  text "_NRST" at 29.54,52.324 h1.02 r90
  text "MH2" at 80.34,50.444 h1.02
  text "^" at 83.642,48.447 h1.02
  text "°" at 91.211,46.457 h0.76
  text "100n" at 90.17,46.242 h1.02
  text "60" at 38.735,46.228 h1.02
  text "1u" at 33.579,45.669 h1.02
  text "MH2" at 58.445,45.136 h1.02
  text "Act_Ucan" at 26.01,44.653 h1.52 r90
  text "^" at 84.098,44.564 h1.02
  text "100" at 89.891,44.272 h1.02
  text "." at 91.364,44.272 h1.02
  text "°" at 37.744,43.79 h1.02
  text "CANout" at 71.958,43.79 h1.52
  text "CANin" at 49.301,43.713 h1.52
  text "." at 5.232,43.358 h1.02
  text "3*100R" at 2.108,42.545 h1.02 r90
  text "150" at 89.916,42.443 h1.02
  text "^" at 91.211,42.164 h1.02
  text "-" at 57.506,41.402 h1.02
  text "." at 51.562,40.945 h1.02
  text "1k" at 89.916,40.589 h1.02
  text "-" at 91.237,40.564 h1.02
  text "." at 5.25,39.521 h1.02
  text "1n" at 41.91,39.421 h1.02
  text "+" at 91.237,38.735 h1.02
  text "10k" at 89.916,38.71 h1.02
  text "#" at 47.225,38.455 h1.02
  text "°" at 34.646,38.151 h0.76
  text "+" at 43.34,38.024 h1.02
  text "1n" at 21.082,37.719 h1.02
  text "100p" at 55.499,37.033 h1.02 r270
  text "*" at 91.288,36.779 h1.02
  text "100k" at 90.018,36.728 h1.02
  text "." at 5.25,35.788 h1.02
  text "°" at 16.332,35.306 h0.76
  text "UART1" at 76.784,35.103 h2.03 r90
  text "1M" at 89.916,34.925 h1.02
  text "#" at 91.218,34.925 h1.02
  text "RpuU1tx_1" at 56.296,34.646 h1.02 r90
  text "1n" at 41.834,33.68 h1.02
  text "*" at 88.443,32.549 h1.02
  text "17p" at 53.543,32.182 h1.02 r90
  text "Rsu1rx_2" at 70.485,32.029 h1.02
  text "5V" at 6.655,31.547 h1.02
  text "2.2u" at 20.422,30.404 h1.02
  text "GND" at 58.852,29.95 h1.02 r90
  text "STM32F407V" at 36.119,29.312 h1.02
  text "GND" at 92.288,29.235 h1.02 r90
  text "°" at 42.951,28.804 h0.76
  text "17p" at 53.619,28.473 h1.02 r90
  text "°" at 86.081,27.965 h0.76
  text "GND" at 62.636,27.686 h1.02
  text "°" at 39.878,27.076 h0.76
  text "Ureg_3V" at 62.738,23.952 h1.52
  text "4.7u" at 53.746,22.454 h1.02 r90
  text "4.7u" at 77.546,21.895 h1.02
  text "UART" at 79.172,20.625 h2.03 r90
  text "GND" at 77.521,20.193 h1.02 r90
  text "°" at 40.157,18.263 h0.76
  text "2.2u" at 28.067,16.281 h1.02
  text "1n" at 40.843,16.053 h1.02
  text "TX" at 71.222,15.265 h1.02
  text "RX" at 73.762,15.265 h1.02
  text "5V" at 68.453,15.189 h1.02